# EAGLE board mainboard (EAGLE 6.4)
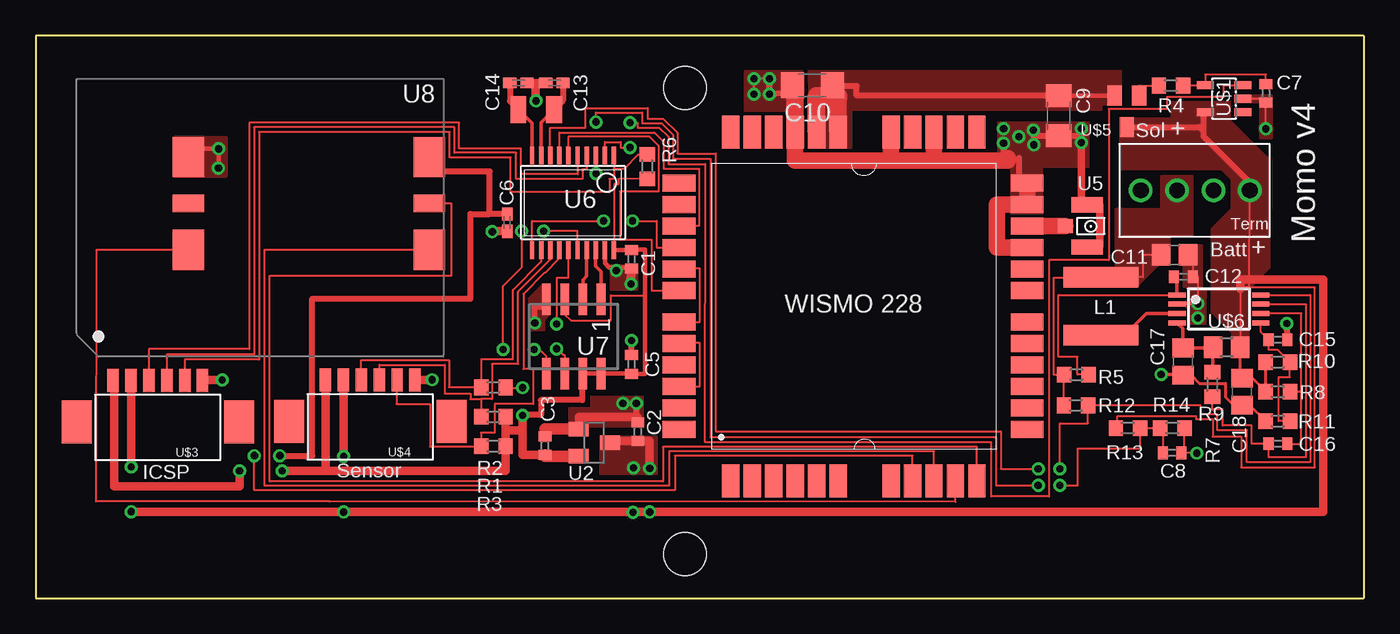
[diagram p0: board, top side]
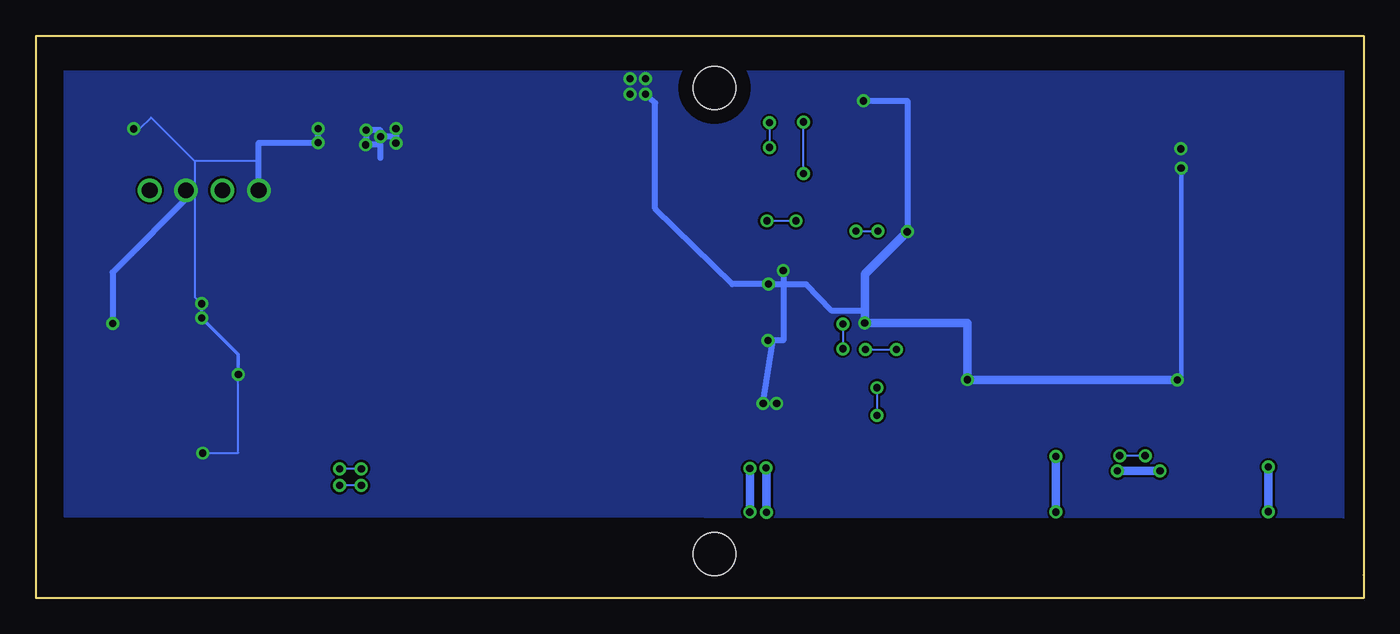
[diagram p1: board, bottom side, seen from below]

Size 92.74 x 39.29 mm. Coordinates in mm from the lower left corner, seen from the top.
Outline: 0,1.63 0,39.29 92.74,39.29 92.74,0 0,0 0,1.6
Copper layers (1*16): Top 0.035mm / dielectric 1.5mm / Bottom 0.035mm
Design rules "default *": minimum track width 6mil, minimum drill 12mil, track to track 6mil, track to pad 6mil, pad to pad 6mil, via to via 6mil, smd to smd 6mil, copper to edge 40mil, drill to drill 8mil, minimum pad ring 10mil, minimum via ring 8mil, stop-mask expansion 4mil, vias tented up to drill 0mil, thermal gap 10mil
Net classes: 0 default: width 0.152 mm, drill 0.305 mm, clearance 0.152 mm
Holes 3 mm at 45.34,35.66 45.34,3.07

## Footprints (pad centres in the part's own frame; a part is rotated, then mirrored left to right if it is on the bottom)
C0402 = smd 0.7 x 0.9: 1 -0.65,0; 2 0.65,0
C0402K = smd 0.925 x 0.74: 1 -0.6,0; 2 0.6,0
C1206 = smd 1.6 x 1.8: 1 -1.4,0; 2 1.4,0
C0805 = smd 1.3 x 1.5: 1 -0.95,0; 2 0.95,0
L-COILCRAFT = smd 1.43 x 5.24: P$1 0,0; P$2 4.04,0
R0603 = smd 1 x 1.1: 1 -0.85,0; 2 0.85,0
R0805 = smd 1.3 x 1.5: 1 -0.95,0; 2 0.95,0
SOT23 = smd 1 x 1.4: 1 -0.95,-1.1; 2 0.95,-1.1; 3 0,1.1
GSM_MODULE = smd 2.3 x 1.2: ANT 21.2,-7.2; CT103/TXD -3.1,-8.7; CT104/RXD -3.1,-11.7; CT105/RTS -3.1,-10.2; CT106/CTS -3.1,-13.9; CT107/DSR -3.1,-15.4; CT108/DTR -3.1,-18.4; CT109/DCD -3.1,-16.9; CT125/RI -3.1,-19.9; GND1 21.2,-8.7; GND2 21.2,-5.7; GND3 21.2,-4.2; GPIO3 21.2,-15.4; GPIO5 21.2,-10.2; ON/OFF -3.1,-7.2; PWM0 -3.1,-5.7; PWM1 -3.1,-4.2; RESET 21.2,-21.4; SPI-CLK 21.2,-16.9; SPI-CS 21.2,-13.9; SPI-IO 21.2,-19.9; SPI-O 21.2,-18.4; TX_CTRL 21.2,-11.7; VCC_2V8 -3.1,-21.4 | smd 1.2 x 2.3: AUX_ADC0 6.5,-25; BAT-RTC 8,-25; BUZZER 0.5,-0.65; GND 11.7,-0.65; GND4 14.7,-0.65; GND5 5,-0.65; GPIO1 17.7,-0.65; MICN 5,-25; MICP 3.5,-25; NC 13.2,-0.65; NC2 3.5,-0.65; NC3 2,-0.65; SIM_CLK 14.7,-25; SIM_IO 16.2,-25; SIM_RST 17.7,-25; SIM_VCC 13.2,-25; SPI-IRQ 16.2,-0.65; SPKN 2,-25; SPKP 0.5,-25; VBAT1 8,-0.65; VBAT2 6.5,-0.65; WISMO_READY 11.7,-25
RFJACK = smd 1.05 x 1: ANTENNA 2.795,1.488 | smd 2.2 x 1.05: UNUSED1 1.27,2.953; UNUSED2 1.27,0
SSOP20 = smd 0.305 x 1.245: 1 -2.857,-3.302; 2 -2.222,-3.302; 3 -1.587,-3.302; 4 -0.952,-3.302; 5 -0.317,-3.302; 6 0.318,-3.302; 7 0.953,-3.302; 8 1.588,-3.302; 9 2.223,-3.302; 10 2.858,-3.302; 11 2.858,3.302; 12 2.223,3.302; 13 1.588,3.302; 14 0.953,3.302; 15 0.318,3.302; 16 -0.317,3.302; 17 -0.952,3.302; 18 -1.587,3.302; 19 -2.222,3.302; 20 -2.857,3.302
SOP08 = smd 0.6 x 2.2: 1 -1.905,-2.6; 2 -0.635,-2.6; 3 0.635,-2.6; 4 1.905,-2.6; 5 1.905,2.6; 6 0.635,2.6; 7 -0.635,2.6; 8 -1.905,2.6
SIMSLOT = smd 2.2 x 2.8: CLOCK 1.1,3.24; GND 17.9,-3.24; IO 17.9,3.24; VCC 1.1,-3.24 | smd 2.2 x 1.2: RESET 1.1,0; VPP 17.9,0
SOT23-5L = smd 0.55 x 1.2: 1 -0.95,-1.3; 2 0,-1.3; 3 0.95,-1.3; 4 0.95,1.3; 5 -0.95,1.3
MICROCON6 = smd 0.8 x 1.6: 1 -2.5,0; 2 -1.25,0; 3 0,0; 4 1.25,0; 5 2.5,0; 6 3.75,0 | smd 2.1 x 3: P$7 -5.05,-2.9; P$8 6.3,-2.9
SSOT-3 = smd 1 x 1.4: 1 -0.85,-2.2; 2 0.85,-2.2; 3 0,0
TSSOP8 = smd 1.2 x 0.35: 1 -2.925,0.975; 2 -2.925,0.325; 3 -2.925,-0.325; 4 -2.925,-0.975; 5 2.925,-0.975; 6 2.925,-0.325; 7 2.925,0.325; 8 2.925,0.975
SCREWTERM4 = drill 1.1: P$1 0,0; P$2 2.54,0; P$3 5.08,0; P$4 7.62,0
1206 = smd 1.1 x 1.9: P$1 0,0; P$2 2.5,0

## Placement (x,y rotation side)
C1  100 nF  [C0402]  41.61,23.67 270 top
C2  1 uF  [C0402]  42.04,11.63 90 top
C3  1 uF  [C0402]  35.56,10.67 90 top
C5  100 nF  [C0402]  41.61,16.33 90 top
C6  100 nF  [C0402K]  32.92,26.24 270 top
C7  .1 uF  [C0402]  85.9,35.26 270 top
C8  100 nF  [C0402]  79.35,10.16 0 top
C9  22 uF  [C1206]  71.42,33.71 270 top
C10  22 uF  [C1206]  54.23,35.84 180 top
C11  10 uF  [C0805]  79.53,23.98 0 top
C12  100 nF  [C0402]  80.14,22.45 0 top
C13  18 pF  [C0402K]  36.22,35.99 180 top
C14  18 pF  [C0402K]  33.71,35.99 0 top
C15  1 nF  [C0402]  86.74,18.06 0 top
C16  1 uF  [C0402]  86.74,10.8 0 top
C17  10 uF  [C0805]  80.11,16.54 270 top
C18  10 uF  [C0805]  84.23,14.43 270 top
L1  10 uH  [L-COILCRAFT]  74.37,22.43 270 top
R1  10K  [R0603]  31.95,12.67 0 top
R2  10K  [R0603]  31.95,14.73 0 top
R3  10K  [R0603]  31.95,10.62 0 top
R4  1K  [R0603]  79.27,35.81 180 top
R5  1K  [R0603]  72.67,15.62 0 top
R6  10K  [R0603]  42.7,30.15 270 top
R7  1K  [R0603]  82.17,14.94 90 top
R8  1K  [R0603]  86.74,14.43 180 top
R9  0.17R  [R0805]  83.16,17.55 0 top
R10  900K  [R0603]  86.74,16.48 180 top
R11  346K  [R0603]  86.74,12.37 0 top
R12  10K  [R0603]  72.64,13.46 0 top
R13  500K  [R0603]  76.28,11.89 180 top
R14  500K  [R0603]  79.38,11.89 180 top
U2  MCP1702  [SOT23]  38.99,10.87 270 top
U4  WISMO_228  [GSM_MODULE]  48.03,33.2 0 top
U5  RFANTENNA  [RFJACK]  74.7,27.48 180 top
U6  PIC24F16KA101-X_PSSOP  [SSOP20]  37.52,27.64 180 top
U7  FLASH8MSOP8  [SOP08]  37.57,18.29 180 top
U8  SIMSLOT  [SIMSLOT]  28.57,27.58 180 top
U$1  LTC1981  [SOT23-5L]  82.98,34.9 90 top
U$3  MICROCON6  [MICROCON6]  7.9,15.21 0 top
U$4  MICROCON6  [MICROCON6]  22.73,15.24 0 top
U$5  N-MOSFET  [SSOT-3]  76.2,32.92 180 top
U$6  SPV1040  [TSSOP8]  82.63,20.22 0 top
U$9  SCREWTERM4  [SCREWTERM4]  77.17,28.5 0 top
XTAL1  32.768khz  [1206]  36.2,34.14 180 top

## Library data of the parts
C1-C3 C5-C18 R1-R14 = rcl
L1 U2 U4-U8 U$1 U$3-U$6 U$9 XTAL1 = components

## Nets
+12V: C11.1 L1.P$1 R5.1 R12.1 U$9.P$2
CLK: U4.SIM_CLK U8.CLOCK
CS: U6.18 U7.1
GND: C1.2 C2.2 C3.2 C5.2 C6.2 C7.2 C8.2 C9.2 C10.2 C11.2 C12.2 C13.2 C14.2 C15.2 C17.2 C18.2 R11.1 R14.1 U2.1 U4.GND U4.GND1 U4.GND2 U4.GND3 U4.GND4 U4.GND5 U5.UNUSED1 U5.UNUSED2 U6.19 U7.4 U8.GND U$1.2 U$3.6 U$4.6 U$6.2 U$9.P$1 U$9.P$3
ICLK: R2.1 U6.12 U$4.3
IDAT: R1.1 U6.13 U$4.4
IO: U4.SIM_IO U8.IO
IRQ: R3.1 U6.14 U$4.5
N$1: U4.ANT U5.ANTENNA
N$3: U4.CT107/DSR U4.CT108/DTR
N$4: R4.2 U$5.1
N$5: C12.1 R5.2 U$6.1
N$6: C7.1 R4.1 U$1.4
N$7: U6.2 U$1.3
N$8: L1.P$2 U$6.3
N$9: C15.1 R10.1 R11.2 U$6.5
N$10: C17.1 R7.2 R9.1 U$6.4
N$11: C16.1 R7.1 U$6.7
N$12: C16.2 R8.1 U$6.6
N$13: R12.2 U6.8 U$6.8
N$15: R6.1 U6.1 U$3.5
N$16: C8.1 R13.1 R14.2 U6.3
N$18: U6.5 U$3.3
N$19: U6.4 U$3.4
N$23: U4.CT105/RTS U4.CT106/CTS
N$24: C14.1 U6.10 XTAL1.P$2
N$25: C13.1 U6.9 XTAL1.P$1
ON: U4.ON/OFF U6.7
RESET: U4.SIM_RST U8.RESET
RX: U4.CT104/RXD U6.6
SCLK: U6.15 U7.6
SDI: U6.17 U7.2
SDO: U6.16 U7.5
TX: U4.CT103/TXD U6.11
V+: C2.1 C18.1 R8.2 R9.2 R10.2 R13.2 U2.3 U$1.5 U$3.2 U$4.2 U$5.3 U$9.P$4
VCCINT: C1.1 C3.1 C5.1 R1.2 R2.2 R3.2 R6.2 U2.2 U6.20 U7.3 U7.7 U7.8 U$3.1 U$4.1
VCCIO: U4.VCC_2V8
VCCSIM: C6.1 U4.SIM_VCC U8.VCC
VDD: C9.1 C10.1 U4.VBAT1 U4.VBAT2 U$5.2

## Tracks (layer width: path | path; a pad name or v marks a point on that pad's centre or on a via)
+12V
  Top 0.152: R5.1 71.96,15.62 | R5.1 71.09,15.62 71.09,22.4 75.77,22.4 L1.P$1 77.32,22.43 77.32,23.98 C11.1 | R12.1 71.79,15.62 R5.1
  pour Top (no thermals): 78.61,29.51 80.77,29.51 80.77,27.23 80.77,25.25 79.15,25.25 79.15,23.27 78.77,23.27 78.41,23.27 76.94,21.79 71.83,21.79 71.83,23.09 75.44,23.09 75.44,27.2 78.61,27.2
CLK
  Top 0.152: U4.SIM_CLK 62.73,10.26 44.22,10.26 44.22,7.85 15.98,7.85 15.98,24.34 U8.CLOCK
CS
  Top 0.254: U7.1 39.47,22.81 39.09,23.19 U6.18
GND  (via drill 0.5, 0.5 pad 0.25)
  Top 0.152: C7.2 85.9,34.85 | 85.9,34.85 85.9,34.9 U$1.2 85.85,34.9 85.9,34.85 | v51.23,36.3 v50.17,36.3 50.14,36.3 50.11,36.27 50.11,35.36 v50.17,35.2 | C11.2 80.79,23.98 C12.2 81.15,22.45 v81.15,20.57 | C7.2 85.85,34.6 | v85.9,32.79 C7.2 | R14.1 80.23,10.16 C8.2 80,10.13 v81.08,10.13
  Top 0.203: C17.2 80.68,15.59 81.25,15.01 83.08,15.01 83.08,14.05 83.65,13.48 C18.2 84.78,13.48 R11.1
  Top 0.254: U$6.2 79.73,20.57 v81.15,20.57 | C17.2 80.08,15.62 v78.59,15.62
  Top 0.305: U6.19 39.74,23.41 40.03,23.11 40.67,23.11 | 40.67,23.11 41.51,23.11 C1.2 | v40.54,22.89 40.67,23.11 | U8.GND 10.68,31.39 v12.78,31.39 12.78,30.05 v12.75,30.05
  Top 0.406: 35.74,20.19 35.72,20.37 | 35.72,20.37 U7.4 | C5.2 v41.61,18.01 | v41,13.61 v41.94,13.61 41.94,12.65 42.04,12.65 | C10.2 52.83,35.31 v51.23,35.2 v51.23,36.3 | C15.2 87.39,19.19 v87.38,19.2 | v67.59,31.8 67.59,30.76 67.89,30.76 | v34.85,19.23 34.85,20.37 35.72,20.37 | 68.66,30.76 68.66,29 U4.GND3 | v69.67,32.69 69.67,32.31 C9.2 73.03,32.31 v73.03,32.82
  Top 0.508: U5.UNUSED1 73.43,24.56 74.32,24.56 74.32,27.48 U5.UNUSED2 73.03,27.48 v73.03,31.83
  Top 0.61: U$3.6 11.65,15.24 v13,15.24 | v27.69,15.27 27.69,15.24 U$4.6 | 32.92,25.6 C6.2 31.91,25.64 v31.88,25.6 | C14.2 34.9,35.99 | 34.9,35.99 C13.2 | v34.93,34.75 34.9,34.75 34.9,35.99 | U2.1 37.92,11.82 37.92,12.65 42.04,12.65 C2.2
  Top 0.635: v41.58,21.95 C1.2
  Top 0.813: U2.1 35.56,11.82 C3.2
  Top 1.143: U4.GND1 67.13,24.5 67.13,27.5 U4.GND2 U4.GND3 | U4.GND5 53.03,30.56 59.73,30.56 | 59.73,30.56 62.73,30.56 | 62.73,30.56 67.89,30.56 67.89,30.76 | U4.GND 59.73,30.56 | U4.GND4 62.73,30.56
  Top 1.219: U4.GND5 53.03,35.84 C10.2
  Bottom 0.152: U$9.P$1 77.17,30.53 81.64,30.53 | 81.64,30.53 81.64,28.5 | 81.64,28.5 U$9.P$3 | 81.64,28.5 81.64,21.06 v81.15,20.57 | 81.64,30.53 84.68,33.58 85.47,32.79 v85.9,32.79 | v78.59,15.62 78.59,10.16 81.08,10.16 v81.08,10.13
  Bottom 0.254: v81.15,20.57 v81.15,19.58 78.59,17.02 v78.59,15.62
  Bottom 0.305: v12.75,30.05 12.75,15.24 13.67,15.24
  Bottom 0.406: v40.54,22.89 40.54,18.01 41.25,18.01 | 41.25,18.01 v41.61,18.01 | v41.94,13.61 41.25,18.01 | U$9.P$1 77.17,31.83 v73.03,31.83 v73.03,32.82 | v67.59,32.82 v67.59,31.8 67.59,32.26 v68.66,32.26 68.66,32.69 v69.67,32.69 69.67,31.67 v69.7,31.67 68.66,31.67 68.66,30.76 | v50.17,35.2 49.48,34.62 49.48,27.23 44.09,21.95 v41.58,21.95 38.94,21.95 37.19,20.12 34.85,20.12 v34.85,19.23 | v34.93,34.75 31.88,34.75 v31.88,25.6 | 81.64,28.5 87.38,22.76 v87.38,19.2
  Bottom 0.61: v13,15.24 13.67,15.24 27.69,15.24 v27.69,15.27 27.69,19.23 v34.85,19.23 34.85,22.63 v31.88,25.6
  pour Top (no thermals): 67.21,33.27 73.51,33.27 73.51,30.12 67.21,30.12
  pour Top (no thermals): 52.5,31.5 53.54,31.5 53.54,36.83 49.5,36.83 49.5,34.06 52.5,34.06
  pour Top (no thermals): 80.26,20.4 80.54,20.4 80.54,19.18 81.71,19.18 81.71,20.98 80.52,20.98 80.52,20.7 80.26,20.7
  pour Top (no thermals): 85.47,32.16 86.33,32.16 86.33,35.1 83.74,35.13 83.74,34.67 85.47,34.67
  pour Top (no thermals): 68.1,26.92 70.31,26.92 70.31,30.28 68.1,30.28
  pour Bottom (no thermals): 90.73,36.83 1.42,36.83 1.42,5.61 90.73,5.69
  pour Top (no thermals): 41.99,23.29 41.99,21.51 40.16,21.51 40.16,23.29
  pour Top (no thermals): 35.38,21.92 34.42,20.95 34.42,18.75 35.53,18.75 35.53,19.43 35.53,19.48 35.89,19.84 35.89,21.92
  pour Top (no thermals): 9.68,29.54 13.26,29.54 13.26,32.16 9.68,32.16
  pour Top (no thermals): 79.86,24.66 81.43,24.66 81.43,21.64 81.71,21.64 81.71,20.98 80.59,20.98 80.59,21.74 80.16,21.74 80.16,23.32 79.86,23.32
  pour Top (no thermals): 38.51,11.38 38.51,12.01 42.42,12.01 42.42,14.07 38.76,14.07 38.76,13.26 37.24,13.26 37.24,11.38
ICLK
  Top 0.152: U6.12 35.29,23.51 33.32,21.54 33.32,16.69 31.1,16.69 R2.1 31.1,14.76 28.85,14.76 28.85,16.64 22.73,16.64 U$4.3
IDAT
  Top 0.152: U6.13 35.93,23.66 33.68,21.41 33.68,16.36 31.85,16.36 31.85,13.92 31.1,13.92 | 31.1,13.92 R1.1 | U$4.4 24,15.24 24,16.31 28.55,16.31 28.55,14.3 30.35,14.3 30.35,13.92 31.1,13.92
IO
  Top 0.152: U4.SIM_IO 64.23,6.73 20.52,6.76 4.22,6.76 4.24,24.34 U8.IO
  Top 0.305: 10.68,24.31 U8.IO
IRQ
  Top 0.152: U6.14 36.55,23.73 35.55,22.73 35.51,22.73 34.06,21.26 34.06,16 34.75,16 34.75,13.56 32.05,13.56 32.05,11.56 31.09,11.56 R3.1 31.1,10.59 27.53,10.59 27.53,13.56 25.2,13.56 25.2,15.24 U$4.5
N$1
  Top 1.143: U4.ANT U5.ANTENNA
N$3
  Top 0.152: U4.CT108/DTR 46.38,14.8 46.38,17.83 44.93,17.83 U4.CT107/DSR
N$4
  Top 0.152: U$5.1 77.05,35.81 R4.2
N$5
  Top 0.152: R5.2 72.75,15.62 72.75,16.87 71.42,16.87 71.42,21.19 U$6.1
  Top 0.254: U$6.1 79.7,22.21 C12.1
N$6
  Top 0.152: R4.1 80.12,35.85 U$1.4 81.66,35.85 81.66,36.58 85.9,36.58 C7.1
N$7  (via drill 0.5)
  Top 0.152: U6.2 39.74,31.88 40.84,31.88 40.84,31.5 v41.5,31.5 | U$1.3 82.96,35.85 82.96,35.03 79.02,35.03 79.02,34.19 74.93,34.19 74.93,23.62 70.76,23.62 70.76,7.11 66.73,7.11 66.73,10.9 46.74,10.9 46.76,30.33 44.17,30.33 44.17,32.23 43.54,32.87 42.04,32.87 42.04,33.22 v41.5,33.22
  Bottom 0.152: v41.5,33.22 v41.5,31.5
N$8
  Top 0.254: L1.P$2 76.1,18.41 77.57,19.89 U$6.3
N$9
  Top 0.152: U$6.5 85.55,18.6 C15.1 86.09,17.36 86.11,17.35 86.73,17.35 R10.1 87.59,15.44 86.79,15.44 86.79,12.37 R11.2
N$10
  Top 0.254: U$6.4 80.11,18.83 C17.1 82.14,17.49 R9.1 82.21,15.83 R7.2
N$11
  Top 0.152: R7.1 82.17,13.18 82.88,13.18 82.88,12.06 84.91,12.06 84.91,10.79 C16.1 86.09,9.85 88.7,9.85 88.7,20.54 U$6.7
N$12
  Top 0.152: R8.1 87.59,14.45 88.39,14.45 | 88.39,14.45 88.39,19.89 U$6.6 | C16.2 88.39,10.79 88.39,14.45
N$13  (via drill 0.5)
  Top 0.152: U6.8 35.92,30.94 35.92,32.87 38.38,32.87 38.38,34.24 42.72,34.24 42.72,33.5 43.82,33.5 44.81,32.51 44.81,31.06 47.47,31.06 47.47,11.66 67.39,11.66 67.39,9.04 v70,9.04 | v71.53,9.04 71.53,12.22 73.48,12.22 73.48,13.46 R12.2 81.36,13.46 81.36,12.83 82.52,12.83 82.52,11.73 84.58,11.73 84.58,9.5 89,9.5 89,21.19 U$6.8
  Bottom 0.152: v70,9.04 v71.53,9.04
N$15
  Top 0.152: U6.1 40.37,30.02 | 40.37,30.02 41.1,30.02 42.07,31 R6.1 | 40.37,30.02 40.37,29.29 40.06,29.29 40.06,28.37 33.17,28.37 33.17,30.78 28.91,30.78 28.91,32.56 15.6,32.56 15.6,16.66 10.4,16.66 U$3.5
N$16  (via drill 0.5)
  Top 0.152: U6.3 39.12,30.94 v39.12,29.67 | v39.12,33.27 39.12,33.93 42.34,33.93 42.34,33.17 43.71,33.17 44.5,32.38 44.5,30.71 47.12,30.71 47.12,11.25 67.06,11.25 67.06,7.87 v70,7.87 | v71.53,7.87 72.77,7.87 72.77,10.46 77.13,10.46 R13.1 R14.2 78.7,11.89 C8.1
  Bottom 0.152: v39.12,29.67 v39.12,33.27 | v70,7.87 v71.53,7.87
N$18
  Top 0.152: U6.5 37.85,30.94 37.85,29.62 33.88,29.62 33.88,31.42 29.57,31.42 29.57,33.22 14.91,33.22 14.91,17.4 7.9,17.4 U$3.3
N$19
  Top 0.152: 38.51,30.94 U6.4 38.46,30.94 38.46,29.95 38.18,29.95 38.18,29.29 33.55,29.29 33.55,31.11 29.24,31.11 29.24,32.89 15.24,32.89 15.24,17.02 9.15,17.02 U$3.4
N$23
  Top 0.152: U4.CT106/CTS 46.38,19.3 46.38,23.04 44.93,23.04 U4.CT105/RTS
N$24
  Top 0.254: U6.10 34.66,33.17 XTAL1.P$2
  Top 0.406: C14.1 33.11,34.73 XTAL1.P$2
N$25
  Top 0.254: U6.9 35.29,33.24 XTAL1.P$1
  Top 0.406: C13.1 36.82,34.76 XTAL1.P$1
ON
  Top 0.152: U6.7 36.56,32.54 43.21,32.54 43.84,31.9 43.84,30 46.33,30 46.33,26.01 U4.ON/OFF
RESET
  Top 0.152: U4.SIM_RST 65.73,10.57 43.79,10.57 43.79,8.15 16.33,8.15 16.33,22.53 29.03,22.53 29.03,27.58 U8.RESET
RX
  Top 0.152: U6.6 37.2,32.23 42.88,32.23 43.51,31.6 43.51,28.42 40.79,28.42 40.79,25.04 43,25.04 43,21.5 U4.CT104/RXD 44.93,21.51
SCLK  (via drill 0.5)
  Top 0.152: U6.15 37.19,24.33 37.19,22.38 36.37,22.38 v36.37,19.15 | v36.37,17.42 36.93,16.97 U7.6
  Bottom 0.152: v36.37,19.15 v36.37,17.42
SDI
  Top 0.254: U6.17 38.47,22.49 38.2,22.22 U7.2
SDO  (via drill 0.5)
  Top 0.152: U6.16 37.82,25.65 v35.46,25.65 | v33.93,25.65 33.93,23.11 32.64,21.82 v32.64,17.37 | U7.5 35.66,16.89 35.18,17.37 v34.8,17.37
  Bottom 0.152: v35.46,25.65 v33.93,25.65 | v34.8,17.37 v32.64,17.37
TX  (via drill 0.5)
  Top 0.152: 44.93,24.56 U4.CT103/TXD | U6.11 34.66,26.36 v39.65,26.36 | 44.93,24.76 U4.CT103/TXD | v41.68,26.36 43.36,26.36 43.36,24.51 44.93,24.51 U4.CT103/TXD
  Bottom 0.152: v39.65,26.36 v41.68,26.36
V+  (via drill 0.5)
  Top 0.152: 84.11,21.59 R9.2 | 84.11,21.59 84.73,21.67 U$9.P$4 | R13.2 75.54,11.89 75.54,12.73 81.03,12.73 81.03,12.52 82.19,12.52 82.19,11.3 84.18,11.3 84.18,9.14 89.33,9.14 89.33,21.69 84.11,21.69 84.11,21.59
  Top 0.203: R10.2 R8.2 84.94,15.38 C18.1 84.11,15.49 R9.2 84.48,17.55
  Top 0.406: U$9.P$4 84.79,29.03 81.56,32.26 81.56,32.59 | 81.56,32.59 81.56,33.83 U$1.5 | U$5.3 81.23,32.92 81.56,32.59
  Top 0.61: 84.11,21.59 84.11,22.28 89.92,22.28 89.92,6.02 v42.88,6.02 v21.49,6.02 21.49,6.04 v6.65,6.04 | v21.49,9.91 21.48,13.03 U$4.2 | U$3.2 v6.65,9.17 | U2.3 40.09,10.98 C2.1 42.88,10.98 v42.88,9.07
  Bottom 0.61: v21.49,6.02 v21.49,9.91 | v6.65,9.17 v6.65,6.04 | v42.88,6.02 v42.88,9.07 | v41.73,9.09 41.71,9.09 v41.71,5.99
  pour Top (no thermals): 75.77,33.55 79.35,33.55 79.35,34.7 83.39,34.7 83.39,33.4 86.18,30.61 86.18,27.25 83.54,27.25 83.54,29.24 82.83,29.95 75.84,29.95 75.74,29.95 75.74,33.58
  pour Top (no thermals): 83.52,16.84 84.71,16.84 84.71,21.62 86.18,23.09 86.18,27.23 86.18,29.41 83.92,29.41 83.54,29.41 83.54,27.23 82.09,25.78 82.09,20.75 82.09,19.99 83.52,18.57
  pour Top (no thermals): 39.45,11.3 43.36,11.3 43.36,8.64 39.45,8.64
VCCINT  (via drill 0.5)
  Top 0.152: U7.3 36.93,19.84 37.36,19.41 40.16,19.41 40.16,21.16 42.55,21.16 | R6.2 40.69,29.27 40.69,28.93 40.39,28.93 40.39,24.33 U6.20 | R2.2 32.8,14.71 v33.99,14.71 | 33.99,11.71 33.86,11.71
  Top 0.305: U6.20 40.38,24.32 C1.1 41.61,24.36 42.55,24.36 42.55,21.16 42.55,15.68 C5.1 U7.8 U7.7
  Top 0.406: U7.7 38.15,15.69 38.15,13.84 35.28,13.84 35.28,12.8 33.99,12.8 v33.99,12.78
  Top 0.61: U$4.1 20.24,15.24 20.24,8.89 | 20.24,8.89 32.79,8.89 R3.2 32.8,11.71 | 32.8,11.71 R1.2 | 33.86,11.71 32.8,11.71 | 5.36,15.21 U$3.1 5.46,15.21 5.46,7.8 14.22,7.8 v14.22,8.89 | v17.2,8.89 20.24,8.89 | v33.99,12.78 33.99,11.71 33.99,10.02 C3.1
  Top 0.813: U2.2 35.56,9.92 C3.1
  Bottom 0.152: v33.99,14.71 v33.99,12.78
  Bottom 0.61: v14.22,8.89 v17.2,8.89
VCCSIM  (via drill 0.5)
  Top 0.152: U4.SIM_VCC 61.23,9.96 44.63,9.96 44.63,7.54 15.27,7.54 v15.27,9.96
  Top 0.406: C6.1 31.7,26.84 31.7,26.85 | 31.7,26.85 31.7,29.82 27.48,29.82 U8.VCC | v17.04,9.96 19.3,9.96 19.3,20.93 30.35,20.93 30.35,26.85 31.7,26.85
  Bottom 0.152: v15.27,9.96 v17.04,9.96
VDD
  Top 0.152: C10.1 56.03,35.84 56.03,34.92
  Top 0.305: U$5.2 C9.1
  Top 0.406: C9.1 57.33,35.12 57.33,35.79 55.63,35.79 C10.1
  Top 1.27: U4.VBAT1 56.03,34.92 56.03,35.11 54.53,35.11 U4.VBAT2
  pour Top (no thermals): 53.97,31.47 56.95,31.45 56.97,34.14 74.45,34.14 74.45,34.52 75.82,34.52 75.79,36.86 53.95,36.83 54.05,31.47

## Text on the board
tPlace: Sol | + | + | Momo v4 | Batt | ICSP | Sensor